# Altium PCB audio_cape_pcb.PcbDoc
Units mm, origin at the board's own origin, x right, y up, seen from the top; angles counter-clockwise.
Board outline 69.34 x 67.31 mm, 2 copper layers (Top Layer, Bottom Layer); 25 components, 36 nets, 189 pads, 34 vias.
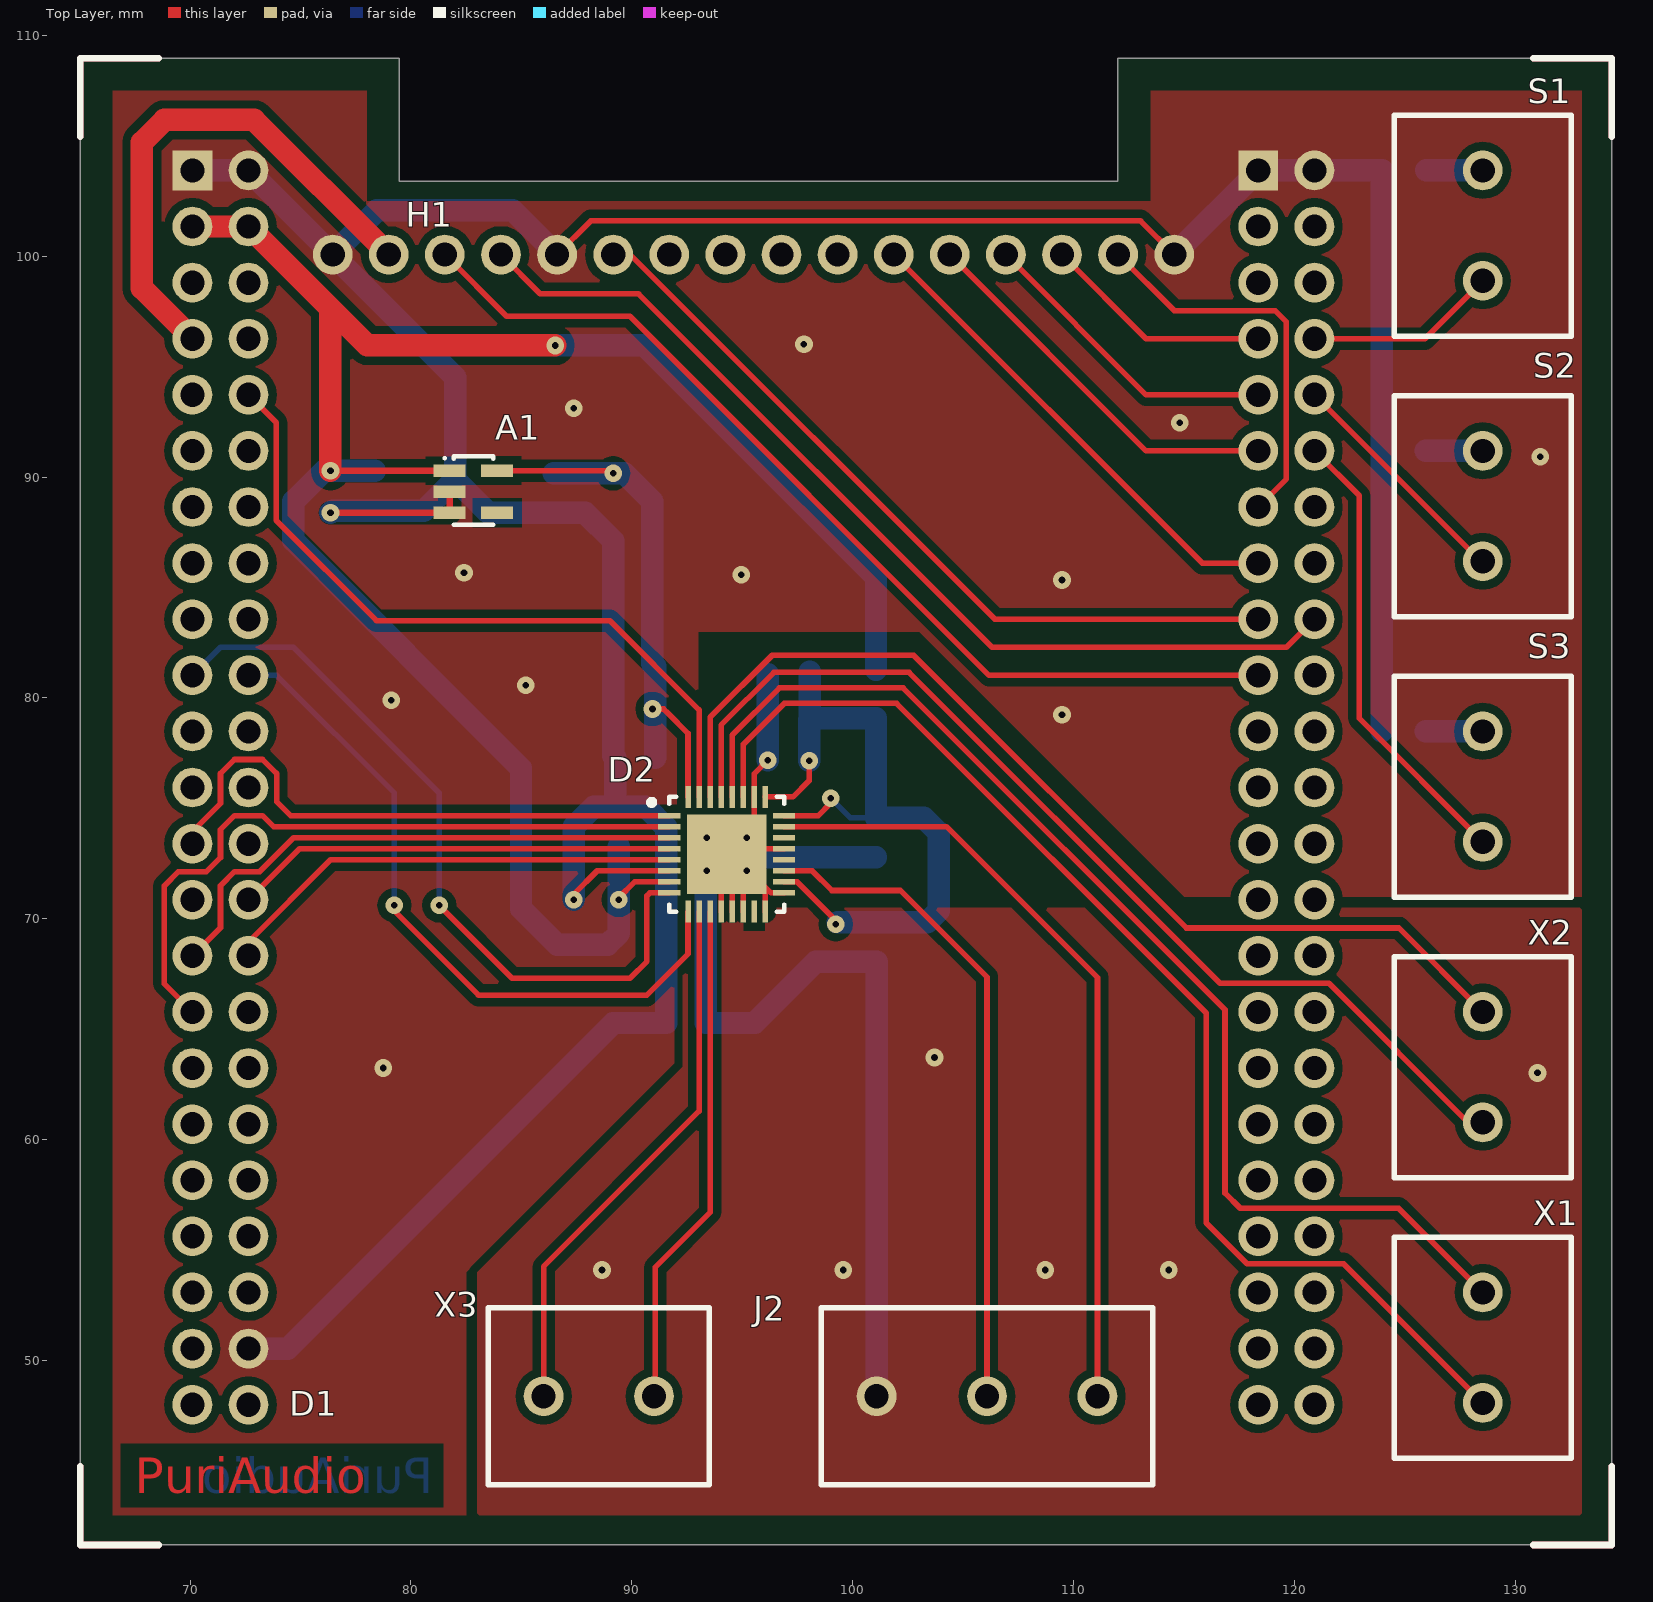
[diagram p0: Top Layer view]
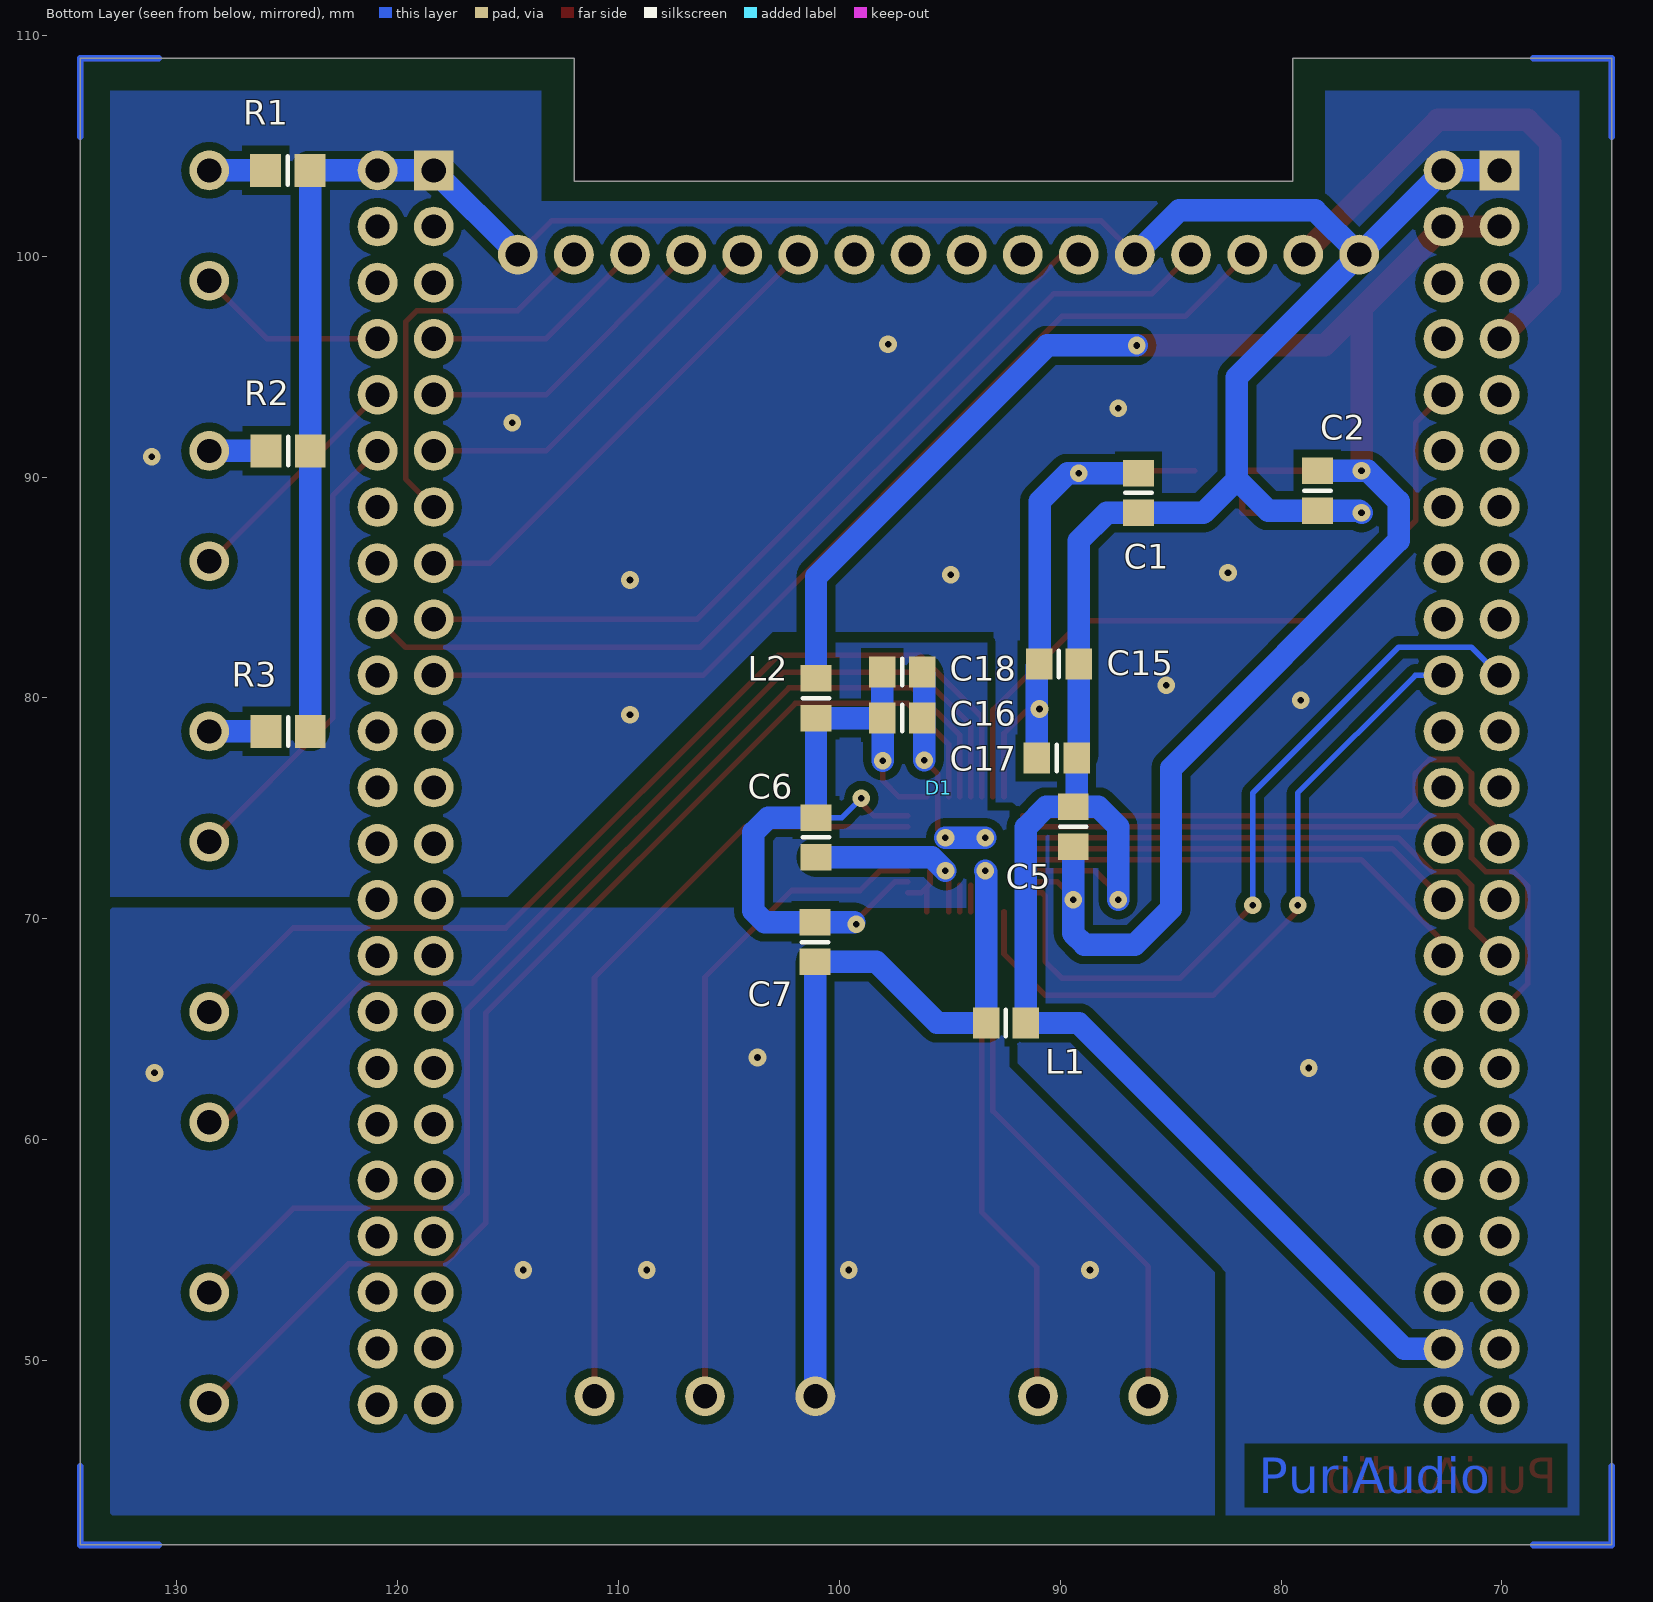
[diagram p1: Bottom Layer view, seen from below]

## Layer stack, top to bottom
Top Layer: signal copper 0.0356
Dielectric: dielectric 0.32, FR-4, Dk 4.8
Bottom Layer: signal copper 0.0356

## Board outline
65.024,41.656 65.024,108.966 79.466,108.966 79.466,103.386 112,103.386 112,108.966 134.366,108.966 134.366,41.656

## Design rules (kind name [scope] priority, off if disabled: settings)
Clearance Clearance_1 [InPolygon] p1: gap=0.381
Clearance [All] p2: gap=0.203
ComponentClearance ComponentClearance_1 [InComponent('D1')] p1 off: gap=0 collisioncheckmode=3 verticalgap=0
ComponentClearance [All] p2 off: gap=0.254 collisioncheckmode=3 verticalgap=0.254
Height [All] p1 off: minheight=0 maxheight=25.4 prefheight=12.7
HoleSize [All] p1: absolutevalues=TRUE maxlimit=25.4 minlimit=0.025 maxpercent=80.000 minpercent=20.000
PolygonConnect [All] p1: connectstyle=Direct reliefconductorwidth=0.254 reliefentries=4 polygonreliefangle="90 Angle"
RoutingVias [All] p1: holewidth=1 width=2 viastyle="Through Hole" minholewidth=0.025 minwidth=0.025 maxholewidth=25.4 maxwidth=25.4
SolderMaskExpansion [All] p1: expansion=0.102
TestPointUsage FabricationTestPointUsage [All] p1: valid=0 allowmultiple=FALSE
Testpoint FabricationTestpoint [All] p1: side=3 testpointundercomponent=TRUE minsize=1.016 maxsize=2.54 preferedsize=1.524 minholesize=0 maxholesize=1.016 preferedholesize=0.813 testpointgrid=0.025 style=297 order=0-112345678
Width [All] p1: maxlimit=25.375 minlimit=0.127 preferedwidth=0.254 minimp=50.000000 maximp=50.000000 favimp=50.000000
16 further rules are at their usual default settings.

## Components (designator, comment, footprint, x,y, rotation, side; value= is the part's Value field where it differs from the comment)
A1 "TPS76918" DBV005 81.754,90.286 r270 top
C1 "10u" 6-0805_N 86.454,89.286 r90 bottom
C2 "100n" 6-0805_N 78.354,89.386 r90 bottom
C5 "100n" 6-0805_N 89.408,74.168 r270 bottom
C6 "100n" 6-0805_N 101.054,73.686 r90 bottom
C7 "100n" 6-0805_N 101.092,68.95 r90 bottom
C15 "10u" 6-0805_N 90.056,81.534 r0 bottom
C16 "10u" 6-0805_N 97.154,79.086 r0 bottom
C17 "100n" 6-0805_N 90.154,77.286 r0 bottom
C18 "100n" 6-0805_N 97.154,81.186 r0 bottom
D1 "beaglebone_black" BBB_CAPE 95.504,75.946 r270 bottom locked
D2 "TLV320AIC3104" QUAD32-RHB 91.694,74.676 r0 top
H1 "lcd_16x2" SIP16 76.454,100.076 r0 top
J2 "headphone_output" STEZALJKA_3P_5MM 101.079,48.386 r0 top
L1 "Ferit" 6-0805_N 92.454,65.286 r0 bottom
L2 "Ferit" 6-0805_N 101.054,79.986 r270 bottom
R1 "10k" 6-0805_M 124.968,103.886 r180 bottom
R2 "10k" 6-0805_M 124.952,91.186 r180 bottom
R3 "10k" 6-0805_M 124.952,78.486 r180 bottom
S1 "SW-PB" STEZALJKA_2P_5MM#1 128.524,98.886 r90 top
S2 "SW-PB" STEZALJKA_2P_5MM#1 128.524,86.186 r90 top
S3 "SW-PB" STEZALJKA_2P_5MM#1 128.524,73.486 r90 top
X1 "mono_jack" STEZALJKA_2P_5MM#1 128.524,48.086 r90 top
X2 "mono_jack" STEZALJKA_2P_5MM#1 128.524,60.786 r90 top
X3 "mono_jack" STEZALJKA_2P_5MM#2 86.004,48.386 r0 top

## Footprints (in the part's own frame and the unit in brackets; to place one, negate y for a bottom-side part, rotate by r counter-clockwise, add the part's x,y. Pads: shape width x height; smd on the part's side, far side on the other; paste and mask are expansions set on the pad)
6-0805_M [mm] "Chip Resistor, Body 2.0x1.2mm, IPC Low Density"
  rect 1.4x1.5 smd: 1(-1,0) 2(1,0)
  silkscreen extent 0,-0.65 0,0.65, body extent -1.07,-0.7 1.07,0.7, height 0.7
6-0805_N [mm] "Chip Resistor, Body 2.0x1.2mm, IPC Medium Density"
  rect 1.2x1.4 smd: 1(-0.9,0) 2(0.9,0)
  silkscreen extent 0,-0.6 0,0.6, body extent -1.07,-0.7 1.07,0.7, height 0.7
BBB_CAPE [mm]
  rect 1.8x1.8 hole 1.1: 1(-27.94,25.4) 47(-27.94,-22.86)
  round 1.8 hole 1.1: 2(-27.94,22.86) 3(-25.4,25.4) 4(-25.4,22.86) 5(-22.86,25.4) 6(-22.86,22.86) 7(-20.32,25.4) 8(-20.32,22.86) 9(-17.78,25.4) 10(-17.78,22.86) 11(-15.24,25.4) 12(-15.24,22.86) 13(-12.7,25.4) 14(-12.7,22.86) 15(-10.16,25.4) 16(-10.16,22.86) 17(-7.62,25.4) 18(-7.62,22.86) 19(-5.08,25.4) 20(-5.08,22.86) 21(-2.54,25.4) 22(-2.54,22.86) 23(0,25.4) 24(0,22.86) 25(2.54,25.4) 26(2.54,22.86) 27(5.08,25.4) 28(5.08,22.86) 29(7.62,25.4) 30(7.62,22.86) 31(10.16,25.4) 32(10.16,22.86) 33(12.7,25.4) 34(12.7,22.86) 35(15.24,25.4) 36(15.24,22.86) 37(17.78,25.4) 38(17.78,22.86) 39(20.32,25.4) 40(20.32,22.86) 41(22.86,25.4) 42(22.86,22.86) 43(25.4,25.4) 44(25.4,22.86) 45(27.94,25.4) 46(27.94,22.86) 48(-27.94,-25.4) 49(-25.4,-22.86) 50(-25.4,-25.4) 51(-22.86,-22.86) 52(-22.86,-25.4) 53(-20.32,-22.86) 54(-20.32,-25.4) 55(-17.78,-22.86) 56(-17.78,-25.4) 57(-15.24,-22.86) 58(-15.24,-25.4) 59(-12.7,-22.86) 60(-12.7,-25.4) 61(-10.16,-22.86) 62(-10.16,-25.4) 63(-7.62,-22.86) 64(-7.62,-25.4) 65(-5.08,-22.86) 66(-5.08,-25.4) 67(-2.54,-22.86) 68(-2.54,-25.4) 69(0,-22.86) 70(0,-25.4) 71(2.54,-22.86) 72(2.54,-25.4) 73(5.08,-22.86) 74(5.08,-25.4) 75(7.62,-22.86) 76(7.62,-25.4) 77(10.16,-22.86) 78(10.16,-25.4) 79(12.7,-22.86) 80(12.7,-25.4) 81(15.24,-22.86) 82(15.24,-25.4) 83(17.78,-22.86) 84(17.78,-25.4) 85(20.32,-22.86) 86(20.32,-25.4) 87(22.86,-22.86) 88(22.86,-25.4) 89(25.4,-22.86) 90(25.4,-25.4) 91(27.94,-22.86) 92(27.94,-25.4)
DBV005 [mm]
  rect 0.55x1.45 smd: 1(0,0) 2(0.95,0) 3(1.9,0) 4(1.9,2.15) 5(0,2.15)
  silkscreen extent -0.65,-0.27 2.45,1.98
QUAD32-RHB [mm]
  rect 1x0.25 smd: 1(0,0) 2(0,-0.5) 3(0,-1) 4(0,-1.5) 5(0,-2) 6(0,-2.5) 7(0,-3) 8(0,-3.5) 17(5.2,-3.5) 18(5.2,-3) 19(5.2,-2.5) 20(5.2,-2) 21(5.2,-1.5) 22(5.2,-1) 23(5.2,-0.5) 24(5.2,0)
  rect 0.25x1 smd: 9(0.85,-4.35) 10(1.35,-4.35) 11(1.85,-4.35) 12(2.35,-4.35) 13(2.85,-4.35) 14(3.35,-4.35) 15(3.85,-4.35) 16(4.35,-4.35) 25(4.35,0.85) 26(3.85,0.85) 27(3.35,0.85) 28(2.85,0.85) 29(2.35,0.85) 30(1.85,0.85) 31(1.35,0.85) 32(0.85,0.85)
  rect 3.6x3.6 smd: 33(2.6,-1.75)
  silkscreen extent -0.92,-4.35 5.2,0.85, body extent 0.02,-4.33 5.18,0.83, height 1
SIP16 [mm] "Header, 16-pin"
  round 1.8 hole 1.1: 1(0,0) 2(2.54,0) 3(5.08,0) 4(7.62,0) 5(10.16,0) 6(12.7,0) 7(15.24,0) 8(17.78,0) 9(20.32,0) 10(22.86,0) 11(25.4,0) 12(27.94,0) 13(30.48,0) 14(33.02,0) 15(35.56,0) 16(38.1,0)
STEZALJKA_2P_5MM#1 [mm] "Stezaljka za prikljuène žice, 2 pola, 5mm pitch"
  round 1.8 hole 1.1 mask+0.102: 1(0,0) 2(5,0)
  silkscreen extent -2.5,-4 7.5,4
STEZALJKA_2P_5MM#2 [mm] "Stezaljka za prikljuène žice, 2 pola, 5mm pitch"
  round 1.8 hole 1.1: 1(0,0) 2(5,0)
  silkscreen extent -2.5,-4 7.5,4
STEZALJKA_3P_5MM [mm] "Stezaljka za prikljuène žice, 3 pola, 5mm pitch"
  round 1.8 hole 1.1: 1(0,0) 2(5,0) 3(10,0)
  silkscreen extent -2.5,-4 12.5,4

## Part data
A1: "LDO regulator napona"
C1 C2 C5 C6 C7 C15 C16 C17 C18: library part Cap, "Keramièki kondezator"
H1: "16x2 LCD prikaznik"
J2: library part audio_connector, "Prikljuèak za slušalice"
L1 L2: library part FerriteBead, "Feritna jezgra"
R1 R2 R3: library part Res2, "Resistor"
S1 S2 S3: "Prekidaè-pritisni"
X1 X2 X3: "Mono audio input"

## Via types
v1: diameter 0.8, hole 0.3, Top Layer to Bottom Layer, 30 vias
v2: diameter 0.8, hole 0.3, Top Layer to Bottom Layer, tented top, 4 vias

## Nets (pads, with @x,y where several pads share a name; then routed paths per layer and width w, separated by ;. In a path a pad name is that pad's centre, name@x,y a point inside that pad or via, vN(x,y) a via of type N, cw(c..) or ccw(c..) an arc to the next point about the centre after c; other vN are vias at no path point)
1.8V: A1.5 C1.2 C15.2 C17.2 D2.32 | length 27.2
  Top Layer w0.254: A1.5 89.038,90.286 v1(89.154,90.17) ; v1(90.932,79.502) 91.438,79.502 91.654,79.286 92.544,78.396 D2.32
  Bottom Layer w0.254: C17.2@91.044,77.266 91.059,77.281 91.21,77.432 C17.2@91.054,77.588
  Bottom Layer w1.016: C1.2@86.47,90.17 v1(89.154,90.17) 89.662,90.17 90.932,88.9 C15.2@90.932,81.558 ; C17.2 91.054,77.588 C15.2@91.054,81.436
3.3V: A1.1 C2.2 C5.2 D1.3 D1.4 D2.7 L2.1 | length 93.3
  Top Layer w0.254: v1(89.408,70.866) 89.408,70.957 90.127,71.676 D2.7
  Top Layer w0.305: v1(76.354,90.286) A1.1
  Top Layer w1.016: D1.3 D1.4 76.354,97.636 ; v1(76.354,90.286) 76.354,97.636 ; v1(86.529,95.961) 78.029,95.961 76.354,97.636
  Bottom Layer w1.016: C2.2 v1(76.354,90.286) 76.062,90.286 74.676,88.9 74.676,87.122 84.98,76.818 84.98,70.468 86.614,68.834 88.9,68.834 89.408,69.342 v1(89.408,70.866) C5.2 ; v1(86.529,95.961) 90.579,95.961 101.054,85.486 L2.1@101.054,81.286
5V: D1.7 H1.2 | length 24
  Top Layer w1.016: D1.7 67.818,98.552 67.818,105.156 68.834,106.172 72.898,106.172 H1.2
A: D1.59 H1.15 | length 17.8
  Top Layer w0.254: H1.15 114.554,97.536 119.126,97.536 119.634,97.028 119.634,89.916 D1.59
AGND: C6.1 C7.1 C16.1 C18.1 D2.12 D2.13 D2.14 D2.16 D2.17 D2.21 D2.26 D2.33 J2.1 L1.2 | length 59.1
  Top Layer w0.254: D2.12 D2.33@94.044,71.526 ; D2.13 D2.33@94.544,71.526 ; D2.14 D2.33@95.044,72.026 ; D2.33@95.544,74.026 D2.26 95.544,76.576 v1(96.154,77.186) ; D2.33@95.694,73.176 D2.21 ; D2.33@95.894,72.176 95.894,71.584 96.302,71.176 D2.17 D2.17@96.594,71.176 ; D2.16 D2.33@96.044,71.326 ; J2.1@101.054,48.411 J2.1
  Bottom Layer w1.016: v2(93.394,72.176) 93.354,72.136 L1.2 95.556,65.286 98.32,68.05 C7.1 J2.1@101.092,48.399 ; v2(93.394,73.676) v2(95.194,73.676) ; v2(95.194,72.176) 95.804,72.786 C6.1 ; v1(96.154,77.186) C18.1@96.154,81.086
  other v1: 88.646,54.102 99.568,54.102 108.712,54.102 114.3,54.102 131,63.025 103.7,63.725
AUD_3V3: C6.2 C7.2 C16.2 C18.2 D2.18 D2.24 D2.25 L2.2 | length 34.3
  Top Layer w0.254: D2.25 97.294,75.526 98.029,76.261 v1(98.029,77.161) ; D2.18 97.486,71.676 99.229,69.933 v1(99.229,69.761) ; D2.24 98.444,74.676 99,75.232 v1(99,75.466)
  Bottom Layer w0.254: v1(99,75.466) 99.88,74.586 C6.2
  Bottom Layer w1.016: v1(98.029,77.161) C16.2@98.029,79.011 ; C18.2 C16.2 L2.2 C6.2 103.214,74.586 103.886,73.914 103.886,70.358 103.378,69.85 C7.2 v1@99.318,69.85
BCLK: D1.31 D2.2 | length 31.4
  Top Layer w0.254: D1.31 68.834,67.056 68.834,71.501 69.469,72.136 70.739,72.136 71.374,72.771 71.374,74.041 72.009,74.676 73.279,74.676 73.779,74.176 D2.2
D4: D1.61 H1.11 | length 22.3
  Top Layer w0.254: H1.11 115.824,86.106 D1.61
D5: D1.57 H1.12 | length 17.7
  Top Layer w0.254: H1.12 113.284,91.186 D1.57
D6: D1.55 H1.13 | length 14.1
  Top Layer w0.254: H1.13 113.284,93.726 D1.55
D7: D1.53 H1.14 | length 10.5
  Top Layer w0.254: H1.14 113.284,96.266 D1.53
DGND: A1.2 A1.3 C1.1 C2.1 C5.1 C15.1 C17.1 D1.1 D1.2 D1.44 D1.47 D1.48 D2.6 H1.1 H1.5 H1.16 L1.1 R1.2 R2.2 R3.2 | length 177.7
  Top Layer w0.254: H1.5 88.138,101.6 113.03,101.6 H1.16 ; v1(87.376,70.866) 87.376,71.12 88.432,72.176 D2.6
  Top Layer w0.305: v1(76.354,88.386) A1.3 A1.2
  Bottom Layer w1.016: D1.1 D1.2 82,94.53 82,89.9 ; D1.44 74.422,50.546 89.162,65.286 L1.1 91.554,74.146 90.632,75.068 88.268,75.068 87.376,74.176 v1(87.376,70.866) ; v1(76.354,88.386) 76.454,88.486 80.586,88.486 82,89.9 ; H1.1 78.453,102.075 84.615,102.075 H1.5 ; C17.1@89.156,77.384 C15.1 89.154,81.536 89.154,87.122 87.89,88.386 83.514,88.386 82,89.9 ; C5.1@89.254,75.222 C17.1 ; H1.16 D1.47 R1.2 ; R3.2 R1.2@123.952,103.87
  other v1: 78.74,63.246 109.474,79.248 79.1,79.9 85.2,80.575 109.474,85.344 94.95,85.575 82.4,85.675 131.125,90.925 114.808,92.456 87.375,93.125 97.79,96.012
DIN: D1.30 D2.5 | length 21.2
  Top Layer w0.254: D1.30 72.644,68.961 76.359,72.676 D2.5
DOUT: D1.28 D2.4 | length 20
  Top Layer w0.254: D1.28 74.954,73.176 D2.4
E: D1.63 H1.6 | length 36
  Top Layer w0.254: H1.6 89.924,100.076 106.434,83.566 D1.63
HPLOUT: D2.19 J2.2 | length 30.2
  Top Layer w0.254: D2.19 98.164,72.176 99.054,71.286 102.154,71.286 106.079,67.361 J2.2
HPROUT: D2.23 J2.3 | length 36
  Top Layer w0.254: D2.23 104.244,74.176 111.079,67.341 J2.3
LEFT_LOM: D2.28 X1.2 | length 53.9
  Top Layer w0.254: D2.28 94.544,78.326 96.679,80.461 102.279,80.461 116.854,65.886 116.854,57.586 117.544,56.896 124.714,56.896 X1.2
LEFT_LOP: D2.27 X1.1 | length 55.3
  Top Layer w0.254: D2.27 95.044,77.901 96.899,79.756 101.984,79.756 116.004,65.736 116.004,56.236 117.854,54.386 122.224,54.386 X1.1
MCLK: D1.25 D2.1 | length 26.1
  Top Layer w0.254: D1.25 70.104,73.961 71.374,75.231 71.374,76.581 72.009,77.216 73.279,77.216 73.914,76.581 73.914,75.311 74.549,74.676 D2.1
MIC1LM: D2.11 X3.2 | length 23
  Top Layer w0.254: X3.2 91.054,48.436 91.054,54.224 93.544,56.714 D2.11
MIC1LP: D2.10 X3.1 | length 24.9
  Top Layer w0.254: X3.1 86.004,54.254 93.044,61.294 D2.10@93.044,70.326
NetR1_1: R1.1 S1.2 | length 2.6
  Bottom Layer w1.016: R1.1 S1.2
NetR2_1: R2.1 S2.2 | length 2.6
  Bottom Layer w1.016: R2.1 S2.2
NetR3_1: R3.1 S3.2 | length 2.6
  Bottom Layer w1.016: R3.1 S3.2
RESET: D1.10 D2.31 | length 32.8
  Top Layer w0.254: D1.10 73.9,92.47 73.9,88.04 78.44,83.5 89,83.5 93.044,79.456 D2.31@93.044,75.526
RIGHT_LOM: D2.30 X2.2 | length 46.4
  Top Layer w0.254: D2.30 93.544,79.126 96.354,81.936 102.754,81.936 115.104,69.586 124.724,69.586 X2.2
RIGHT_LOP: D2.29 X2.1 | length 46.5
  Top Layer w0.254: D2.29 94.044,78.776 96.429,81.161 102.554,81.161 115.654,68.061 116.629,67.086 121.554,67.086 X2.1@127.854,60.786
RS: D1.64 H1.4 | length 44.7
  Top Layer w0.254: H1.4 85.852,98.298 90.302,98.298 106.304,82.296 119.634,82.296 D1.64
S1: D1.54 S1.1 | length 8.7
  Top Layer w0.254: D1.54 125.904,96.266 S1.1
S2: D1.56 S2.1 | length 10.7
  Top Layer w0.254: D1.56 S2.1@128.444,86.186
S3: D1.58 S3.1 | length 20.9
  Top Layer w0.254: D1.58 122.936,89.154 122.936,79.074 S3.1
SCL: D1.19 D2.8 | length 34.6
  Top Layer w0.254: v1(81.28,70.612) 84.582,67.31 89.916,67.31 90.678,68.072 90.678,71.044 90.81,71.176 D2.8
  Bottom Layer w0.254: D1.19 71.374,82.296 74.676,82.296 81.28,75.692 v1(81.28,70.612)
SDA: D1.20 D2.9 | length 31.8
  Top Layer w0.254: v1@79.248,70.358 83.058,66.548 90.678,66.548 92.544,68.414 D2.9 D2.9@92.544,69.973
  Bottom Layer w0.254: D1.20 73.914,81.026 79.248,75.692 v1(79.248,70.612)
V0: D1.65 H1.3 | length 44.7
  Top Layer w0.254: H1.3 84.328,97.282 89.918,97.282 106.174,81.026 D1.65
WCLK: D1.29 D2.3 | length 24.9
  Top Layer w0.254: D1.29 71.374,69.596 71.374,71.501 72.009,72.136 73.152,72.136 74.692,73.676 D2.3
pads on no net: A1.4 D1.5 D1.6 D1.8 D1.9 D1.11 D1.12 D1.13 D1.14 D1.15 D1.16 D1.17 D1.18 D1.21 D1.22 D1.23 D1.24 D1.26 D1.27 D1.32 D1.33 D1.34 D1.35 D1.36 D1.37 D1.38 D1.39 D1.40 D1.41 D1.42 D1.43 D1.45 D1.46 D1.49 D1.50 D1.51 D1.52 D1.60 D1.62 D1.66 D1.67 D1.68 D1.69 D1.70 D1.71 D1.72 D1.73 D1.74 D1.75 D1.76 D1.77 D1.78 D1.79 D1.80 D1.81 D1.82 D1.83 D1.84 D1.85 D1.86 D1.87 D1.88 D1.89 D1.90 D1.91 D1.92 D2.15 D2.20 D2.22 H1.7 H1.8 H1.9 H1.10
copper on no net: | length 56.9
  Top Layer w0.305: 65.024,45.212 65.024,41.656 68.58,41.656 ; 65.024,105.41 65.024,108.966 68.58,108.966 ; 130.81,41.656 134.366,41.656 134.366,45.212 ; 130.81,108.966 134.366,108.966 134.366,105.41
  Bottom Layer w0.305: 65.024,45.212 65.024,41.656 68.58,41.656 ; 65.024,105.41 65.024,108.966 68.58,108.966 ; 130.81,41.656 134.366,41.656 134.366,45.212 ; 130.81,108.966 134.366,108.966 134.366,105.41

## Polygon pours and split planes (outlines as drawn)
AGND on Top Layer "Bottom Layer-No Net" (solid, remove dead copper, pour order 50): 92.3,70.5 92.3,74.9 93.3,74.9 93.3,82.5 103,82.5 115,70.5 92.3,70.5
DGND on Top Layer "Bottom Layer-DGND" (solid, remove dead copper, pour order 52): 73,107.5 78,107.5 78,102.5 113.5,102.5 113.5,107.5 118.5,107.5 133,107.5 133,71 115,71 103,83 93,83 93,75 92,75 92,63.5 82.5,54 82.5,43 71.5,43 66.5,43 66.5,48 66.5,107.5
AGND on Top Layer "Bottom Layer-No Net" (solid, remove dead copper, pour order 48): 83,43 115,43 132,43 133,43 133,44 133,70.5 92.3,70.5 92.3,68.6 92.3,67.7 92.3,63.3 83,54
DGND on Bottom Layer "Bottom Layer-DGND" (solid, remove dead copper, pour order 51): 73,107.5 78,107.5 78,102.5 113.5,102.5 113.5,107.5 118.5,107.5 133,107.5 133,71 115,71 103,83 93,83 93,75 92,75 92,63.5 82.5,54 82.5,43 71.5,43 66.5,43 66.5,48 66.5,107.5
AGND on Bottom Layer "Bottom Layer-No Net" (solid, remove dead copper, pour order 49): 92.3,70.5 92.3,74.9 93.3,74.9 93.3,82.5 103,82.5 115,70.5 92.3,70.5
AGND on Bottom Layer "Bottom Layer-No Net" (solid, remove dead copper, pour order 47): 83,43 115,43 132,43 133,43 133,44 133,70.5 92.3,70.5 92.3,68.6 92.3,67.7 92.3,63.3 83,54

## Other copper
Top Layer:
  text "PuriAudio" at 67.5,44 h1.6
Bottom Layer:
  text "PuriAudio" at 81,44 h1.6

## Silkscreen, mask and mechanical layers (free items; w line width, h text height)
Top Overlay:
  lines w0.305: 65.024,45.212 65.024,41.656 68.58,41.656 ; 65.024,105.41 65.024,108.966 68.58,108.966 ; 130.81,41.656 134.366,41.656 134.366,45.212 ; 130.81,108.966 134.366,108.966 134.366,105.41
Mechanical 1:
  lines w0.254: -67.31,12.7 ccw(c-60.96,12.7) -60.96,6.35 ; 65.024,41.656 65.024,48.006 65.024,108.966 67.564,108.966 73.914,108.966 75.184,108.966 76.454,108.966 79.466,108.966 79.466,103.386 111.21,103.386 112,103.386 112,108.966 114.554,108.966 123.444,108.966 132.334,108.966 134.366,108.966 134.366,41.656 131.064,41.656 74.93,41.656 71.374,41.656 65.024,41.656

## Dimensions
65.024,41.656 to 134.366,41.656 on Mechanical 2
134.366,41.656 to 134.366,108.966 on Mechanical 2
79.466,103.386 to 67.564,108.966 on Mechanical 2
72.644,103.886 to 118.364,103.886 on Mechanical 2